# EAGLE board 2mos10 - Copy (EAGLE 6.3)
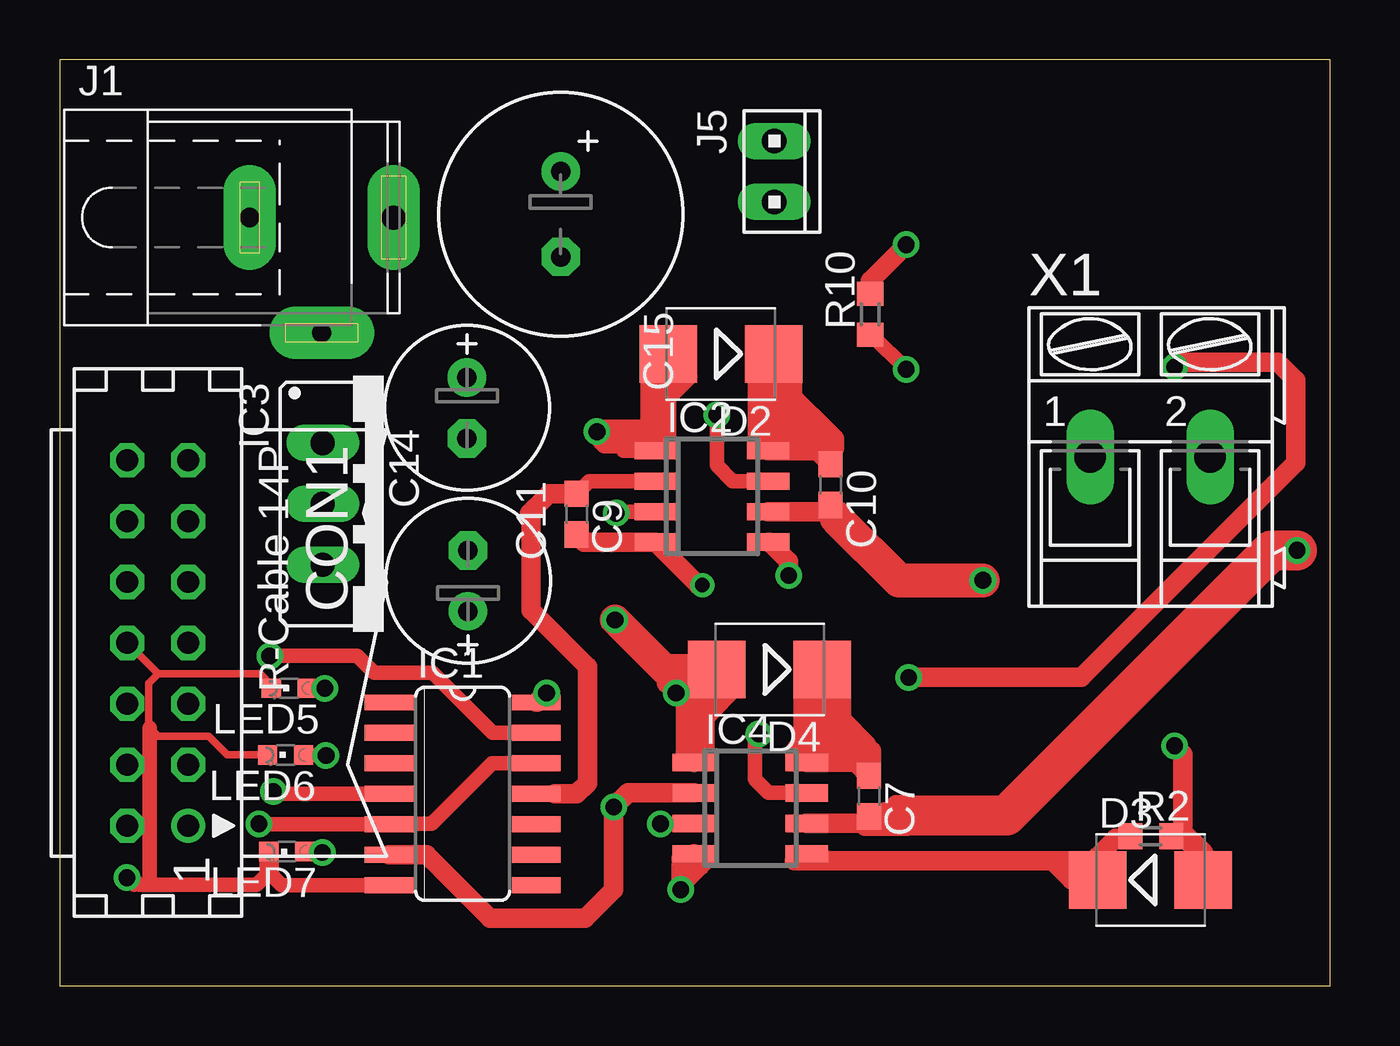
[diagram p0: board, top side]
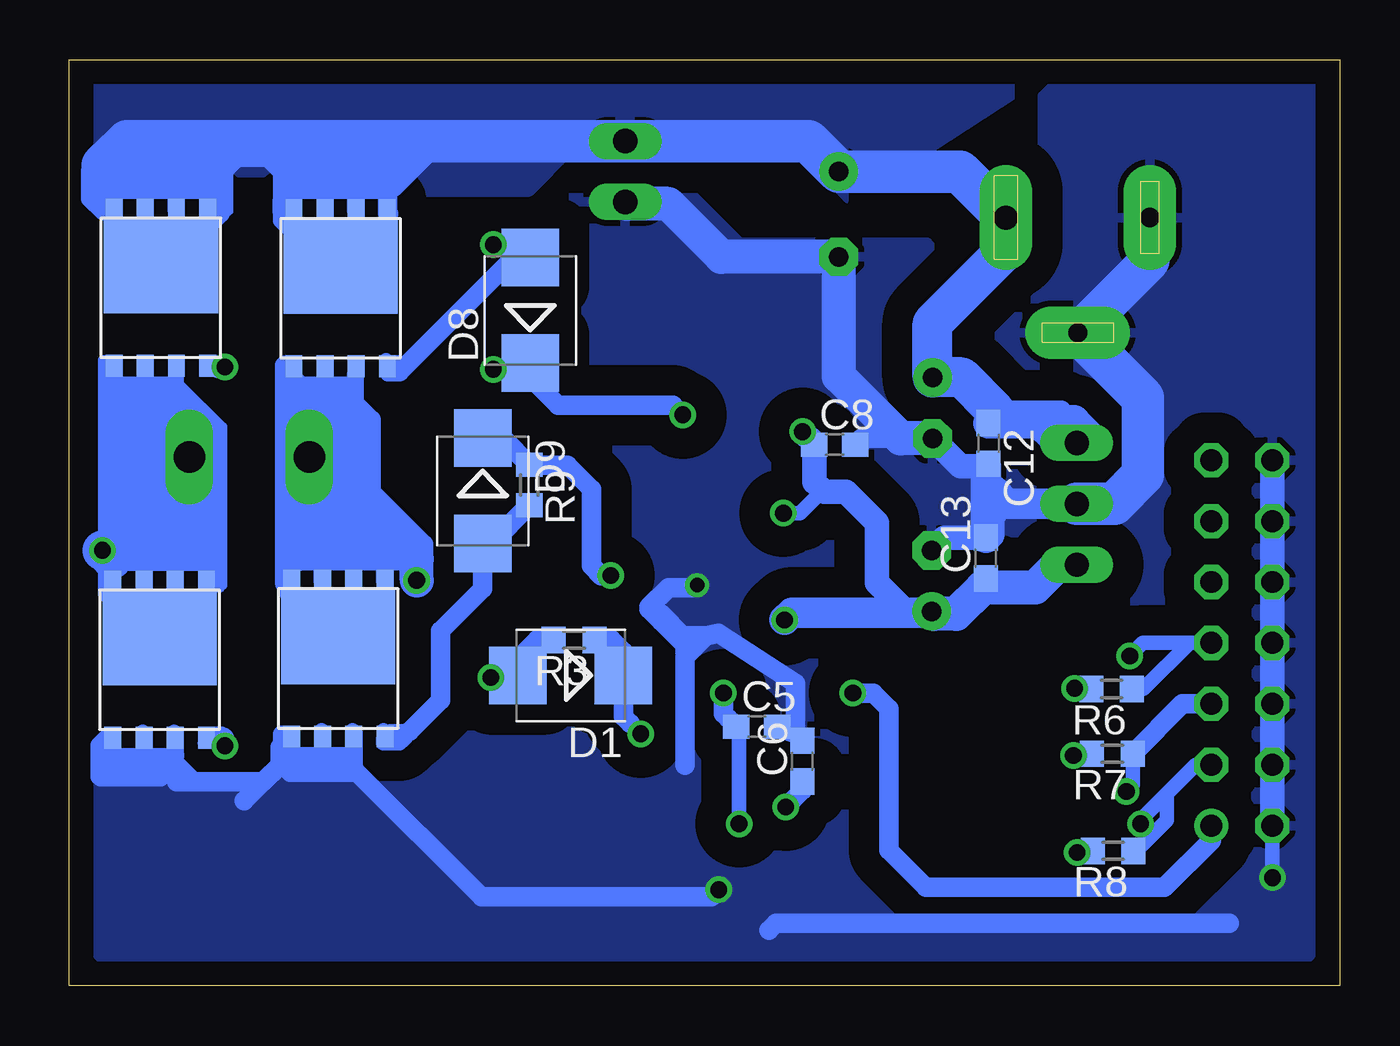
[diagram p1: board, bottom side, seen from below]

Size 53 x 38.6 mm. Coordinates in mm from the lower left corner, seen from the top.
Outline: 0,0 53,0 53,38.6 0,38.6 0,0
Copper layers (1*16): Top 0.035mm / dielectric 1.5mm / Bottom 0.035mm
Design rules "default *": minimum track width 10mil, minimum drill 24mil, track to track 50mil, track to pad 50mil, pad to pad 50mil, via to via 50mil, smd to smd 8mil, copper to edge 40mil, drill to drill 30mil, minimum pad ring 10mil, minimum via ring 8mil, stop-mask expansion 4mil, vias tented up to drill 0mil, thermal gap 10mil

## Footprints (pad centres in the part's own frame; a part is rotated, then mirrored left to right if it is on the bottom)
C0603 = smd 1.1 x 1: 1 -0.85,0; 2 0.85,0
E2,5-7 = drill 0.813 pad 1.6: + -1.27,0 | drill 0.813 pad 1.6 octagon: - 1.27,0
E3,5-10 = drill 0.813 pad 1.6: + -1.778,0 | drill 0.813 pad 1.6 octagon: - 1.778,0
CON14L = drill 0.914: 1 7.62,1.27 | drill 0.914 octagon: 2 7.62,-1.27; 3 5.08,1.27; 4 5.08,-1.27; 5 2.54,1.27; 6 2.54,-1.27; 7 0,1.27; 8 0,-1.27; 9 -2.54,1.27; 10 -2.54,-1.27; 11 -5.08,1.27; 12 -5.08,-1.27; 13 -7.62,1.27; 14 -7.62,-1.27
SMB = smd 2.4 x 2.4: A 2.2,0; C -2.2,0
SO14 = smd 0.66 x 2.032: 1 -3.81,-3.073; 2 -2.54,-3.073; 3 -1.27,-3.073; 4 0,-3.073; 5 1.27,-3.073; 6 2.54,-3.073; 7 3.81,-3.073; 8 3.81,3.073; 9 2.54,3.073; 10 1.27,3.073; 11 0,3.073; 12 -1.27,3.073; 13 -2.54,3.073; 14 -3.81,3.073
SO08 = smd 0.72 x 1.78: 1 -1.905,-2.35; 2 -0.635,-2.35; 3 0.635,-2.35; 4 1.905,-2.35; 5 1.905,2.35; 6 0.635,2.35; 7 -0.635,2.35; 8 -1.905,2.35
78XXS = drill 1.016 long: GND 0,-2.54; IN -2.54,-2.54; OUT 2.54,-2.54
SPC4078 = drill 0.8 pad 2.184 long: 1 -3,0; 2 0,-4.8 | drill 1 pad 2.184 long: 3 3,0
10X02MTA = drill 1.016 long: 1 1.27,0; 2 -1.27,0
CHIPLED_0603 = smd 0.8 x 0.8: A 0,-0.75; C 0,0.75
R0603 = smd 1 x 1.1: 1 -0.85,0; 2 0.85,0
CDS = smd 0.406 x 0.203: D1 1,-0.9; D2 1,0.4; D3 1,1.7; D4 1,3; G 7.1,2.9; P$1 7.2,3.1; P$2 7.2,2.9; P$3 7.2,2.7; P$4 7.5,1.9; P$5 7.6,3.1; P$6 7.6,2.9; P$7 7.6,2.7; P$8 7.6,1.9; P$9 7.1,3.1; P$11 7.1,2.7; P$12 7.5,1.7; P$13 7.2,-1.1; P$14 7.6,-1.1; P$16 7.6,-0.9; P$17 7.1,-0.9; P$18 7.1,-1.1; P$19 7.1,-0.7; P$20 7.5,-0.7; P$21 7.6,-0.7; P$22 7.1,-1.2; P$23 7.5,-1.2; P$24 7.6,-1.2; P$25 7.1,3.2; P$26 7.5,3.2; P$27 7.6,3.2; P$28 7.1,0.1; P$30 7.1,0.5; P$31 7.1,0.6; P$32 7.1,1.4; P$34 7.1,1.8; P$35 7.1,1.9; P$36 7.6,1.7; P$37 7.5,1.5; P$38 7.6,1.5; P$39 7.5,1.4; P$40 7.6,1.4; P$41 7.5,0.6; P$42 7.6,0.6; P$43 7.5,0.4; P$44 7.6,0.4; P$45 7.5,0.2; P$46 7.6,0.2; P$47 7.5,0.1; P$48 7.6,0.1; P$68 1,3.2; P$69 0.6,3.2; P$70 0.6,3; P$72 1.1,3.2; P$73 1.2,3; P$74 0.6,2.8; P$75 1,2.8; P$76 1.1,2.8; P$77 0.6,2.7; P$78 1,2.7; P$79 1.1,2.7; P$80 1.1,1.9; P$81 0.7,1.9; P$82 0.6,1.9; P$83 0.6,1.7; P$85 1.1,1.7; P$86 0.6,1.5; P$87 1,1.5; P$88 1.2,1.5; P$89 0.6,1.4; P$90 1,1.4; P$91 1.2,1.4; P$92 0.6,0.6; P$93 1,0.6; P$94 1.1,0.6; P$95 0.6,0.4; P$97 1.2,0.4; P$98 0.6,0.2; P$99 1,0.2; P$100 1.2,0.2; P$101 0.6,0.1; P$102 1,0.1; P$103 1.1,0.1; P$104 0.6,-0.7; P$105 0.9,-0.7; P$106 1.1,-0.7; P$107 0.6,-0.9; P$109 1.1,-0.9; P$110 0.6,-1.1; P$111 1.1,-1.1; P$112 1,-1.1; P$113 0.6,-1.2; P$114 1,-1.2; P$115 1.1,-1.2; S1 7.2,-0.9; S2 7.1,0.3; S3 7.1,1.6 | smd 1.93 x 0.965: P$49 4.2,-0.9; P$50 2.3,-0.9; P$51 2.3,0; P$52 4.2,0; P$53 4.2,0.9; P$54 2.3,0.9; P$55 4.2,1.8; P$56 2.3,1.8; P$57 2.3,2.7; P$58 4.2,2.7; P$59 4.2,2.9; P$60 2.3,2.9; P$61 2.2,2.9; P$62 2.2,1.9; P$63 2.2,2; P$64 2.2,1; P$65 2.2,0; P$66 2.2,0.1; P$67 2.2,-0.9
AK300/2 = drill 1.321 long: 1 -2.515,0; 2 2.489,0

## Placement (x,y rotation side)
C5  10 uf  [C0603]  24.31,10.8 0 bottom
C6  .01 uf  [C0603]  22.4,9.36 90 bottom
C7  1uf  [C0603]  33.75,7.9 270 top
C8  10 uf  [C0603]  21.06,22.55 0 bottom
C9  .01 uf  [C0603]  21.55,19.66 270 top
C10  1uf  [C0603]  32.15,20.89 270 top
C11  100uf  [E2,5-7]  16.98,24.09 270 top
C12  .33uf  [C0603]  14.65,22.61 270 bottom
C13  .1uf  [C0603]  14.75,17.83 90 bottom
C14  47uf  [E2,5-7]  17.02,16.88 90 top
C15  [E3,5-10]  20.89,32.17 270 top
CON1  [CON14L]  4.08,14.29 270 top
D1  1N5819  [SMB]  32.07,12.94 180 bottom
D2  1N5819  [SMB]  27.57,26.34 180 top
D3  1N5819  [SMB]  45.49,4.41 0 top
D4  1N5819  [SMB]  29.6,13.19 180 top
D8  1N5819  [SMB]  33.76,28.16 90 bottom
D9  1N5819  [SMB]  35.74,20.63 270 bottom
IC1  74ACT00D  [SO14]  16.8,8 270 top
IC2  IR2520DS  [SO08]  27.2,20.4 270 top
IC3  7818  [78XXS]  13.5,20.09 270 top
IC4  IR2520DS  [SO08]  28.8,7.4 270 top
J1  [SPC4078]  10.92,32.03 0 top
J5  [10X02MTA]  29.8,33.95 270 top
LED5  [CHIPLED_0603]  9.57,12.4 90 top
LED6  [CHIPLED_0603]  9.42,9.62 90 top
LED7  [CHIPLED_0603]  9.47,5.59 90 top
R2  15ohm  [R0603]  45.5,6.23 0 top
R3  15ohm  [R0603]  31.93,14.42 180 bottom
R6  [R0603]  9.51,12.37 180 bottom
R7  [R0603]  9.48,9.67 180 bottom
R8  [R0603]  9.45,5.62 180 bottom
R9  15ohm  [R0603]  33.8,20.88 270 bottom
R10  15ohm  [R0603]  33.8,28 90 top
U$1  CSD18503GDS-NEW  [CDS]  42.67,33.18 270 bottom
U$2  CSD18503GDS-NEW  [CDS]  42.77,17.74 270 bottom
U$3  CSD18503GDS-NEW  [CDS]  50.17,33.2 270 bottom
U$4  CSD18503GDS-NEW  [CDS]  50.22,17.69 270 bottom
X1  [AK300/2]  45.49,22.05 0 top

## Library data of the parts
C5-C10 C12 C13 C15 R2 R3 R6-R10 = rcl
C11 C14 = resistor
CON1 = con-harting
D1-D4 D8 D9 = diode
IC1 = 74xx-eu
IC2 IC4 = ir
IC3 = v-reg
J1 = con-jack
J5 = con-amp
LED5-LED7 = led
U$1-U$4 = cds_new
X1 = con-ptr500

## Nets
5VCC: CON1.1 IC1.14
18V1: C5.1 C8.1 C13.1 C14.+ D2.A D4.A IC2.1 IC2.3 IC3.OUT IC4.1 IC4.3
24V1: C11.+ C12.1 C15.+ IC3.IN J1.3 J5.2 U$1.D1 U$1.D2 U$1.D3 U$1.D4 U$3.D1 U$3.D2 U$3.D3 U$3.D4
B1: CON1.7 IC1.13 R6.1
D1: CON1.5 IC1.4 R7.1
GND: C5.2 C6.2 C8.2 C9.2 C11.- C12.2 C13.2 C14.- C15.- CON1.2 CON1.4 CON1.6 CON1.8 CON1.10 CON1.12 CON1.14 IC1.7 IC2.4 IC3.GND IC4.4 J1.1 J1.2 J5.1 LED5.C LED6.C LED7.C U$2.S1 U$2.S2 U$2.S3 U$4.S1 U$4.S2 U$4.S3
IN1: C9.1 IC1.11 IC2.2
IN2: C6.1 IC1.6 IC4.2
N$1: IC1.1
N$2: D3.C IC4.5 R2.1
N$4: C7.2 IC4.6 U$3.S1 U$3.S2 U$3.S3 U$4.D1 U$4.D2 U$4.D3 U$4.D4 X1.2
N$12: D8.A R10.2 U$1.G
N$13: D1.C IC4.7 R3.1
N$14: D1.A R3.2 U$3.G
N$15: D3.A R2.2 U$4.G
N$17: C10.2 IC2.6 U$1.S1 U$1.S2 U$1.S3 U$2.D1 U$2.D2 U$2.D3 U$2.D4 X1.1
N$23: D9.C IC2.5 R9.1
N$24: D9.A R9.2 U$2.G
N$25: D8.C IC2.7 R10.1
N$33: LED5.A R6.2
N$34: LED6.A R7.2
N$35: LED7.A R8.2
P1: CON1.3 IC1.5 IC1.12 R8.1
VB1: C10.1 D2.C IC2.8
VB2: C7.1 D4.C IC4.8

## Tracks (layer width: path | path; a pad name or v marks a point on that pad's centre or on a via)
5VCC  (via drill 0.7)
  Top 0.813: v20.3,12.2 19.91,11.81 IC1.14
  Bottom 0.813: v20.3,12.2 19.45,12.2 18.8,11.55 18.8,5.65 17.25,4.1 7.3,4.1 5.35,6.05 CON1.1
18V1  (via drill 0.7)
  Top 0.61: D2.A 26.3,25.41 26.3,25.4 25.4,24.5 25.4,22.6 25.2,22.8 24.2,22.8 24.5,23.1 24.5,23.2 24.5,25.2 24.7,25 25.4,25 24.9,24.5 24.9,23.2 24.85,23.15 IC2.1 23.5,22.3 23.3,22.5 22.7,22.5 22.3,22.9 | IC2.3 23.27,19.77 v23.2,19.7 | IC4.3 26.43,6.75 v25.05,6.75
  Top 0.813: v25.7,12.2 26.2,12.7 25.71,13.19 25.21,13.19 26.2,12.2 26.2,11.85 26.1,11.75 26.1,9.6 26.7,10.2 26.7,11.2 26.3,11.6 | IC4.1 26.45,11.3 26.85,11.7 26.85,9.45 26.9,9.4 26.9,11.45 27.55,12.1 27.55,11.85 | 27.55,11.85 26.65,10.95 | 27.55,11.85 28,12.3 27,12.3 26.3,11.6 | 26.3,11.6 25.3,12.6
  Top 1.016: v22.4,23.1 24.4,23.1 24.5,23.2
  Top 1.27: D4.A 25.21,13.19 v23.15,15.25
  Bottom 0.406: 14.9,16.6 14.9,16.83 C13.1
  Bottom 0.61: v23.2,19.7 22.5,19.7 21.55,20.65 | v25.05,6.75 25.05,10.69 arc-90 25.5,11.14
  Bottom 0.813: v25.7,12.2 25.7,11.34 25.5,11.14 C5.1
  Bottom 1.016: v22.4,23.1 21.91,22.61 C8.1 21.9,21 21.55,20.65 21.5,20.6 20.6,20.6 19.3,19.3 19.3,16.8 18.11,15.61 C14.+
  Bottom 1.27: v23.15,15.25 22.85,15.55 17.08,15.55 C14.+
  Bottom 1.422: IC3.OUT 11.75,17.55 12.7,16.6 14.9,16.6 16,15.5 16.91,15.5 C14.+
24V1
  Bottom 0.305: 44.1,33.8 44.6,34.3 | 44.6,34.3 44.8,34.5 | 44.8,34.5 45,34.5 | 44.8,34.5 44.7,34.5 44.6,34.4 44.6,34.3 | 44.6,34.3 44.8,34.3 | 45.9,34.3 46.8,34.3 46.4,33.9 46.4,32.2 46.3,32.3 46.3,33.9 45.9,34.3 | 45.8,34.3 45.9,34.3 | 45.8,34.3 45.7,34.4 44.4,34.4 44.5,34.3 44.6,34.3 | 44.8,34.3 45.8,34.3 | 44.8,34.3 44.3,33.8 43.7,34.4 43.5,34.4
  Bottom 0.61: 42.3,33.2 42.27,33.17 U$1.D2 | U$1.D3 41.1,32.31 41.1,33.2 | U$1.D1 43.85,32.46 43.85,32.55 | U$3.D3 48.6,32.33 48.6,33.2 | U$3.D2 49.8,32.23 49.8,33.2 | U$3.D1 51.6,32.2 52.2,32.8 52.2,34 51.75,34.45 51.35,34.45 | 44.1,32.3 44.2,32.2 44.2,31.9 43.9,31.6 43.8,31.7 43.6,31.7 43.6,33.1 | 43.5,33.2 43.5,34.4 43.2,34.7 40,34.7 40,33.4 39.8,33.2 39.6,33.2 38.1,34.7 37.9,34.7 39.4,33.2 40.5,33.2 39.5,34.2 39.1,34.2 39.6,33.7 40.1,34.2 40.4,34.2 40.5,34.1 40.5,33.8 40.9,34.2 | 40.9,34.2 40.9,34.3 | 40.9,34.2 40.9,33.6 41,33.7 43.1,33.7 43,33.8 43,34.4 42.9,34.3 41.1,34.3 | 41.1,35.22 41.72,34.6 44.4,34.6 44.2,34.4 44.2,32.4 43.8,32.8 | 43.8,32.8 43.8,34.2 44.3,34.7 44.9,34.7 44.7,34.5 44.1,33.9 | 44.1,33.9 44.1,33.8 44.1,33.1 43.8,32.8 | 44.1,33.9 44.1,34.4 44.4,34.7 45.9,34.7 46.5,34.1 | 46.5,34.1 46.6,34 46.6,33.9 46.5,33.8 | 46.5,33.8 46.5,34 | 46.5,34.1 46.5,34 | 46.5,33.4 46.5,33.8 | 46.5,33.4 46.8,33.7 46.8,34.3 46.9,34.2 50.4,34.2 50.6,34 50.6,33.7 50.4,33.9 47.1,33.9 46.4,34.6 45.9,34.6 46.5,34 | 46.5,33.4 46.5,33.3 46.7,33.1 46.7,32.8
  Bottom 0.813: U$1.D4 39.7,32.21 39.7,33 39.9,33.2 40.5,33.2 41.1,33.2 42.3,33.2 43.5,33.2 | 43.5,33.2 43.6,33.2 44.1,32.7 44.1,32.3 43.85,32.55 43.7,32.7 43.7,33 43.6,33.1 43.5,33.2 | 51.6,33.1 51.5,33.2 49.8,33.2 48.6,33.2 47.1,33.2 46.7,32.8 46.7,32.2 47.17,31.73 | 47.17,31.73 47.2,31.7 | 47.17,31.73 U$3.D4 | 14.4,24 11.6,24 11.1,23.5
  Bottom 1.27: C12.1 11.34,23.46 11.3,23.5
  Bottom 1.422: 11.3,23.5 11.1,23.5 10.2,22.6 11.7,22.6 11.7,23.4 11.6,23.5 11.6,22.9 11.8,22.7 11.8,22.8 12.3,23.3 11.63,23.3 IC3.IN
  Bottom 1.676: J1.3 13.9,32.01 13.9,30.7 16.98,27.62 C11.+ 15.76,25.36 14.4,24
  Bottom 1.778: 51.6,33.1 51.6,34.2 51.35,34.45 50.58,35.22 41.1,35.22 J5.2 22.16,35.22 C15.+ 15.84,33.95 J1.3
  pour Bottom: 13.6,37.4 20.4,33 22.3,34.9 32.3,34.9 33.9,33.3 43.6,33.3 44.4,34.1 51.3,34.1 52.1,34.9 52.1,37.3 51.5,37.9
B1  (via drill 0.7)
  Top 0.61: IC1.13 18.05,10.55 15.55,13.05 13.1,13.05 12.4,13.75 v8.75,13.75
  Bottom 0.61: CON1.7 5.85,14.3 6.25,14.3 | 6.25,14.3 8.18,12.37 R6.1 | v8.75,13.75 8.2,14.3 6.25,14.3
D1  (via drill 0.7)
  Top 0.61: IC1.4 9,8 v8.9,8.1
  Bottom 0.61: v8.9,8.1 8.63,8.37 R7.1
  Bottom 0.813: R7.1 6.55,11.75 CON1.5
GND  (via drill 0.6, 0.7)
  Top 0.305: CON1.8 4.1,13 | 4.1,13 3.7,12.6 3.7,10.8 3.75,10.75 4.1,10.4 6.2,10.4 6.98,9.62 LED6.C | 4.1,13 8.35,13 8.82,12.53 LED5.C
  Top 0.61: 8.75,4.85 8.75,5.56 LED7.C | 3.1,4.2 v2.8,4.5 3,4.5 3.3,4.2 8.2,4.2 8.72,4.72 9.25,4.19 IC1.7 | 3.75,10.75 3.75,4.55
  Top 0.813: 8.72,4.72 LED7.C | IC4.4 26.25,5.3 | 26.25,5.3 25.9,5.3 | 26.25,5.3 27,5.3 26.7,5 | 26.6,5 25.9,5 25.9,4.3 26.6,5 | 26.7,5 26.6,5 | 26.7,5 25.9,4.2 v25.9,4 | C9.2 21.86,18.5 IC2.4 26.64,16.7 v26.8,16.7
  Bottom 0.61: v2.8,4.5 CON1.2 | U$2.S3 41.15,10.62 41.15,9.7 | 41.2,9.65 41.15,9.7 | 41.05,9.65 41.2,9.65 | 41.05,9.65 41.05,9.7 | 41.05,9.7 41.05,10.55 41.1,10.5 41.1,9.75 41.15,9.7 | 41.2,9.65 42.45,9.65 | 42.45,9.65 43.9,9.65 44.15,9.9 | 44.2,9.95 44.2,10.5 44.16,10.54 U$2.S1 | U$2.S2 42.45,10.62 42.45,9.65 | U$4.S1 51.2,10.41 51.2,9.6 49.9,9.6 | 48.6,9.6 48.55,9.6 48.5,9.65 48.5,9.95 | 48.6,9.6 49.9,9.6 | 48.5,9.95 48.62,10.07 U$4.S3 | U$4.S2 49.9,10.57 49.9,9.6 | 48.5,9.95 48.6,9.85 48.6,9.6 | 48.6,9.6 48.6,9.55 49.05,9.1 51.15,9.1 51.4,9.35 51.4,10.45 51.8,10.05 51.8,8.7 51.7,8.6 49.3,8.6 49.65,8.95 51.6,8.95 51.25,8.6 49.15,8.6 48.88,8.88 48.55,9.2 48.55,9.65 | 44.2,9.95 44.15,9.9 | 44.15,9.9 44.15,9.75 44.2,9.8 | 44.2,9.8 44.2,9.95 | 44.2,9.8 44.2,9.2 43.8,8.8 41.2,8.8 41.05,8.95 41.05,9.65 | 41.05,9.7 41.5,9.25 43.8,9.25
  Bottom 0.813: 14.45,20.65 14.7,20.4 | 14.75,21.66 C12.2 | 18.3,22.82 19.94,22.82 C8.2 | v25.9,4 26.2,3.7 35.8,3.7 41.05,8.95 | 44.2,9.95 44.2,9.2 44.9,8.5 | 44.9,8.5 45.7,7.7 | 44.9,8.5 47.8,8.5 | 47.8,8.5 48.5,8.5 | 48.88,9.03 48.88,9.32 48.6,9.6 | 48.88,9.03 48.88,8.88 | 48.88,9.03 48.6,9.3 47.8,8.5 | 4.6,2.6 23.5,2.6 23.8,2.3 | 27.3,9.2 27.3,13.7 26.4,14.6 | 26.4,14.6 27.4,14.6 28.3,15.5 28.3,15.2 27.2,14.1 27.2,14 27.3,13.9 27.3,14.2 28.8,15.7 28.8,15.8 28,16.6 26.9,16.6 v26.8,16.7 | C6.2 22.7,10.51 | 22.7,10.51 22.7,12.6 25.9,14.7 26.4,14.6 | 22.7,10.51 C5.2
  Bottom 1.016: CON1.2 CON1.4 CON1.6 CON1.8 CON1.10 CON1.12 CON1.14 | 14.75,21.66 15.82,21.66 C11.- | C13.2 16.49,18.68 C14.-
  Bottom 1.27: IC3.GND 13.89,20.09 14.45,20.65 14.5,20.7 14.5,19.7 14.6,19.6 14.6,18.83 C13.2 14.75,21.66
  Bottom 1.422: C11.- 18.3,22.82 20.89,25.41 C15.- 25.79,30.39 28,32.6 29.72,32.6 J5.1
  Bottom 1.676: J1.1 7.92,30.23 J1.2
  Bottom 1.778: J1.2 8.2,24.51 8.2,21.3 9.4,20.1 9.7,20.1 9.71,20.09 IC3.GND
  pour Bottom: 0.5,38.1 0.6,38.2 11.3,38.2 12.4,37.1 12.4,29.4 13.2,28.6 14.8,28.6 17.2,31 25,31 27.2,33.2 36.4,33.2 37.2,32.4 37.2,29.3 39.3,27.2 51.5,27.2 52.4,26.3 52.4,2 51.4,0.8 1.6,0.8 0.6,2 0.5,2.1
IN1
  Top 0.61: IC2.2 22.07,21.04 C9.1 | IC1.11 20.65,8
  Top 0.813: C9.1 20.41,20.51 19.82,19.93 19.65,19.75 | 19.65,19.75 19.6,19.7 | 20.65,8 21.55,8 22,8.45 22,13.3 19.65,15.65 19.65,19.75
IN2  (via drill 0.7)
  Top 0.813: IC1.6 15.3,5.45 17.95,2.8 21.9,2.8 23.1,4 v23.1,7.45 23.7,8.05 26.43,8.05 IC4.2
  Bottom 0.813: v23.1,7.45 22.4,8.15 C6.1
N$2
  Top 0.61: IC4.5 31.4,5.25 31.8,5.25 31.85,5.3 31.85,5.35 31.95,5.25
  Top 0.813: 31.95,5.25 31.9,5.2 | 31.9,5.2 30.65,5.2 | 31.9,5.2 41.4,5.2 | 41.4,5.2 42.2,5.2 | 41.4,5.2 42.19,4.41 D3.C 43.29,5.39 44.05,6.15 44.57,6.15 R2.1
N$4  (via drill 0.7)
  Top 0.61: 35.2,6.8 35.2,7.65 34.85,7.65 34.5,7.3 34.5,7 34.25,6.75 35.15,6.75 35.35,6.55 35.3,6.55 | 35.2,6.55 35.3,6.55 | 35.2,6.55 34.4,7.35 34.5,7.35 35.3,6.55 | 35.2,6.55 33.56,6.55 33.35,6.76
  Top 0.813: IC4.6 33.35,6.76 33.47,6.76 C7.2 33.75,6.85 33.8,6.8 | 35.2,6.8 35.5,7.1
  Top 1.676: 35.5,7.1 39.5,7.1 50.55,18.15 v51.6,18.15
  Bottom 0.406: U$3.S3 48.57,25.43 48.8,25.2 | 48.8,25.2 49.8,25.2 | 49.8,25.2 51.2,25.2 51.3,25.3 51.3,25.77 U$3.S1 | U$3.S2 49.87,25.27 49.8,25.2 | 48.8,25.2 48.6,25.2 48.4,25.4 48.4,25.1 46.6,23.3 46.6,16.7 46.7,16.6 47.13,16.6 U$4.D4 47.11,16.69 46.8,17 46.8,17.1 46.9,17.2 46.9,23 46.9,23.2 47.9,24.2 48,24.2 48.8,25 51.2,25 51.4,25.2 51.4,26.1 51.6,26.1 v51.6,18.15 51.6,16.3 51.4,16.1 51.4,16.41 U$4.D1
  Bottom 0.61: U$4.D1 51.12,17.12 51.2,17.2 51.2,17.8 50.8,18.2 | U$4.D3 48.52,19.32 48.7,19.5 49,19.8 | 49.7,19.9 49.6,19.8 49.6,21.4 49,22 48.7,22 48.5,21.8 48.5,20.3 49.4,20.3 49.4,21 48.9,21.5 48.9,20.4 | U$4.D2 49.82,21.08 49.7,21.2
  Bottom 0.813: 50.8,18.2 50.8,24.5 51.2,24.9 51.2,23.4 | 51.2,23.4 51.2,18.3 | 51.2,23.4 49.8,24.8 50.4,24.8 50.5,24.9 49.3,24.9 48.7,24.3 48.7,24.2 48.2,23.7 48.8,23.7 49.5,24.4 49.5,24.2 50.2,23.5 49.4,23.5 49.3,23.4 47.5,23.4 47.2,23.1 47,23.1 46.9,23 50.3,23 50.3,18.2 50.8,17.7 47.3,17.7 47.1,17.5 47.1,16.8 47.2,16.7 47.2,19.3 | 47.2,19.3 47.2,20.4 47.4,20.6 47.4,18.5 47.8,18.1 49.5,18.1 49.7,18.3 49.7,19.9 49.7,21.2 49.7,22.4 49.6,22.5 47.4,22.5 47.4,19.5 47.2,19.3 | 47.2,19.3 47.5,19.3 48.4,18.4 48.7,18.4 49.5,19.2 48.1,19.2 48,19.3 48,22.03 X1.2
  Bottom 1.422: 48.9,20.4 48.9,19.7 48.7,19.5
  Bottom 1.676: v51.6,18.15 51.55,18.15 51.2,17.8
N$12  (via drill 0.7)
  Top 0.813: R10.2 33.8,29.4 v35.3,30.9
  Bottom 0.61: U$1.G 39.77,25.57 39.7,25.5 39.7,25.7 39.4,26 39.4,25.9 | 39.4,25.9 39.4,25.7 | 39.4,25.9 39.3,26 39.3,25.9 39.1,25.7 39.2,25.7 39.4,25.5 39.5,25.5 39.6,25.6
  Bottom 0.813: 39.6,25.6 39.2,25.6 34.3,30.5 33.9,30.5 D8.A 34.3,30.9 v35.3,30.9
N$13  (via drill 0.7)
  Top 0.61: IC4.7 31.13,8.05 29.55,8.05 29,8.6 29,10.25 29.05,10.3 29.05,10.35 29.1,10.4 29.1,10.45 v29.15,10.5
  Bottom 0.61: v29.15,10.5 29.6,10.95
  Bottom 0.813: 29.6,10.95 29.87,11.22 D1.C 29.87,13.92 30.4,14.45 31.05,14.45 R3.1
N$14  (via drill 0.7)
  Top 0.813: v35.4,12.85 42.6,12.85 51.55,21.8 51.55,25.25 50.8,26 46.7,26 v46.5,25.8
  Bottom 0.406: 34.15,13.75 34.5,13.75 v35.4,12.85 | 46.8,25.75 46.8,25.95 46.65,26.1 U$3.G
  Bottom 0.813: R3.2 33.48,14.42 34.15,13.75 34.15,13.06 D1.A | v46.5,25.8 46.75,25.8 46.8,25.75
N$15  (via drill 0.7)
  Top 0.813: R2.2 46.82,6.23 47.4,5.65 47.4,4.7 D3.A 47.69,5.56 46.85,6.4 46.85,9.65 v46.5,10
  Bottom 0.406: 46.55,10.35 46.55,10.5 46.65,10.6 47.15,10.1 | 47.15,10.1 47.45,10.1 | 47.15,10.1 47.1,10.1 46.6,10.6 U$4.G
  Bottom 0.813: v46.5,10 46.5,10.3 46.55,10.35
N$17  (via drill 0.7)
  Top 0.813: IC2.6 31.88,19.77 C10.2
  Top 1.016: C10.2 32.1,19.99 32.1,19.8 32.4,19.5
  Top 1.422: 32.4,19.5 35,16.9 v38.5,16.9
  Bottom 0.254: 41,25.6 41.07,25.67 U$1.S3 | U$1.S2 42.4,26.05 42.4,25.1
  Bottom 0.61: 43.4,18 43.8,18 43.9,18 44,17.9 44,17.07 U$2.D1 43.9,16.97 43.9,17 44,16.9 44,16.6 43.9,16.5 43.9,16.3 43.7,16.5 43.7,17.9 42,19.6 42,21.9 42,22 | 38.2,18.2 38.2,17.9 38.2,17.6 41.8,21.2 41.8,21.4 40.1,19.7 40.1,18.7 40.3,18.9 41.7,18.9 41.7,20.6 40.6,19.5 40.6,19.3 40.7,19.4 41.3,19.4 41.3,19.8 41,20.1 41,24.4 | U$1.S1 44.02,25.98 44.1,25.9 44.1,25.4 43.8,25.1 42.4,25.1 41.2,25.1 41.1,25 41.1,25.5 41,25.6 41,24.4 | 41.5,23.9 41,24.4 | 41.5,23.9 41.5,21.8 | 41.5,24.6 41.5,23.9 | 39.9,16.87 U$2.D4 | 39.9,18 39.9,16.87 | 39.9,16.87 39.8,16.97 39.8,18 40,18.2 40,18.7 42,18.7 | U$2.D3 41.1,16.77 41.1,18 | U$2.D2 42.5,16.87 42.5,18
  Bottom 0.813: 38.2,18.2 40.4,20.4 40.4,20.6 38.2,18.4 38.2,17.9 40.4,20.1 40.4,23.6 41.3,24.5 41.3,21.5 41.4,21.4 | 41.4,21.4 41.4,21.5 42.1,22.2 42.1,22.1 | 41.4,21.4 41.4,20.2 42.8,21.6 42.8,23.4 42,22.6 42,21.9 42.1,22 | 42.1,22.1 41.4,21.4 | 42.1,22 42.1,22.1 | 42.1,22 43.2,23.1 43.2,21.8 42.5,21.8 42.4,21.9
  Bottom 1.016: 41.5,24.6 41.6,24.5 42.5,24.5 42,24 42,23.1 42.4,22.7 42.4,22.5 42.2,22.3 42,22.3 42.1,22.2 42.4,21.9 43,21.3 43,20.3 42.9,20.4 42.9,24.4 43.8,25.3 43.9,25.3 43.9,23.8 | 43.9,23.8 43.2,23.1 43.1,23 43.1,20.4 43.8,21.1 | 43.8,21.1 43.8,24 | 43.8,21.1 43.8,18 43,18.8 43,19.6 43.9,20.5 | 43.9,23.8 43.9,20.5 | 43.9,20.5 43.9,16.8 | 42,18.7 42,21.9 42,24.2
  Bottom 1.422: v38.5,16.9 38.5,17.8 38.7,18 39.8,18 39.9,18 41.1,18 42.5,18 43.4,18 42.48,18.93 X1.1
N$23  (via drill 0.7)
  Top 0.813: IC2.5 29.61,18.5 30.4,17.7 v30.4,17.1
  Bottom 0.813: v30.4,17.1 30.8,17.1 31.2,17.5 31.2,20.7 32.2,21.7 33.77,21.7 R9.1 34.9,22.83 D9.C
N$24
  Bottom 0.61: U$2.G 39.8,10.57 39.8,10.2 39.6,10.4 39.6,10.6 | 39.6,10.6 39.9,10.3 39.9,10.1 39.2,10.1 39.3,10.2 39.3,10.5 39.1,10.3 39.1,10.2 38.7,10.6 38.8,10.6 39.6,10.6
  Bottom 0.813: R9.2 35.4,18.43 D9.A 35.74,16.56 37.5,14.8 37.5,11.9 38.8,10.6
N$25  (via drill 0.7)
  Top 0.61: IC2.7 28.07,21.04 27.4,21.7 v27.4,23.8 | v35.3,25.7 33.85,27.15 R10.1
  Bottom 0.61: 33.76,25.36 D8.C 34.02,25.7 v35.3,25.7
  Bottom 0.813: v27.4,23.8 27.8,24.2 32.6,24.2 33.76,25.36
N$33  (via drill 0.7)
  Top 0.61: LED5.A v11.05,12.4
  Bottom 0.61: R6.2 11.02,12.37 v11.05,12.4
N$34  (via drill 0.7)
  Top 0.61: v11.1,9.6 10.19,9.6 LED6.A
  Bottom 0.61: R7.2 11.03,9.67 v11.1,9.6
N$35  (via drill 0.7)
  Top 0.61: LED7.A 10.26,5.55 v10.95,5.55
  Bottom 0.61: v10.95,5.55 10.88,5.62 R8.2
P1  (via drill 0.7)
  Top 0.61: IC1.12 18.02,9.27 15.5,6.75 13.75,6.75 IC1.5 8.32,6.73 v8.3,6.75
  Bottom 0.61: CON1.3 5.99,9.21 7.2,8 | 7.2,8 7.2,6.9 8.48,5.62 R8.1 8.57,5.65 | v8.3,6.75 8.3,6.9 7.2,8
VB1
  Top 0.254: 30,23.1 29.8,22.9 28.8,22.9 28.8,22.6 29.3,23.1 30.6,23.1 30.6,23.7
  Top 0.406: 31.3,22.9 31.3,23 | 30.7,23.2 31,23.2 | 31.59,22.3 31.5,22.39 31.5,22.8 32,22.3 | 32,22.3 32.2,22.1 | 32,22.3 30.7,22.3
  Top 0.61: 31,23.2 31.3,22.9
  Top 0.813: C10.1 31.59,22.3 30.7,22.3 | 30.7,22.3 IC2.8 | 30.7,22.3 30.7,23.2 30.6,23.3 30.6,24 30.55,24.05 30.55,25.15 30.35,24.95 30.35,24.75 32.3,22.8 32.3,22.4 32.25,22.45 32.25,22.8 31.35,23.7 30.6,23.7
  Top 1.422: D2.C 29.4,25.97 29.4,23.1 30,23.7 | 30,23.7 30,25.1 | 30,23.1 30,23.7
VB2
  Top 0.813: IC4.8 33.2,9.3 C7.1 33.85,8.85 33.85,9.8 33.65,10 33.65,10.05 32.6,11.1 | D4.C 31.8,10.95 30.7,9.85 30.85,9.85 31,10 31,12.05 31.1,12.15 31.1,10.4 31.6,9.9 31.6,10.1 32,10.5 32,10 32.15,9.85 32.15,11.6 32.4,11.85 32.4,10.75 33.2,9.95 32.8,9.95 32.7,9.85 32.7,10.8 32.6,10.9 32.6,11.1 | 32.6,11.1 32.6,11.95